# EAGLE board Analog-Digital-Mux-Breakout Panel v11 (EAGLE 6.4), part 1 of 2
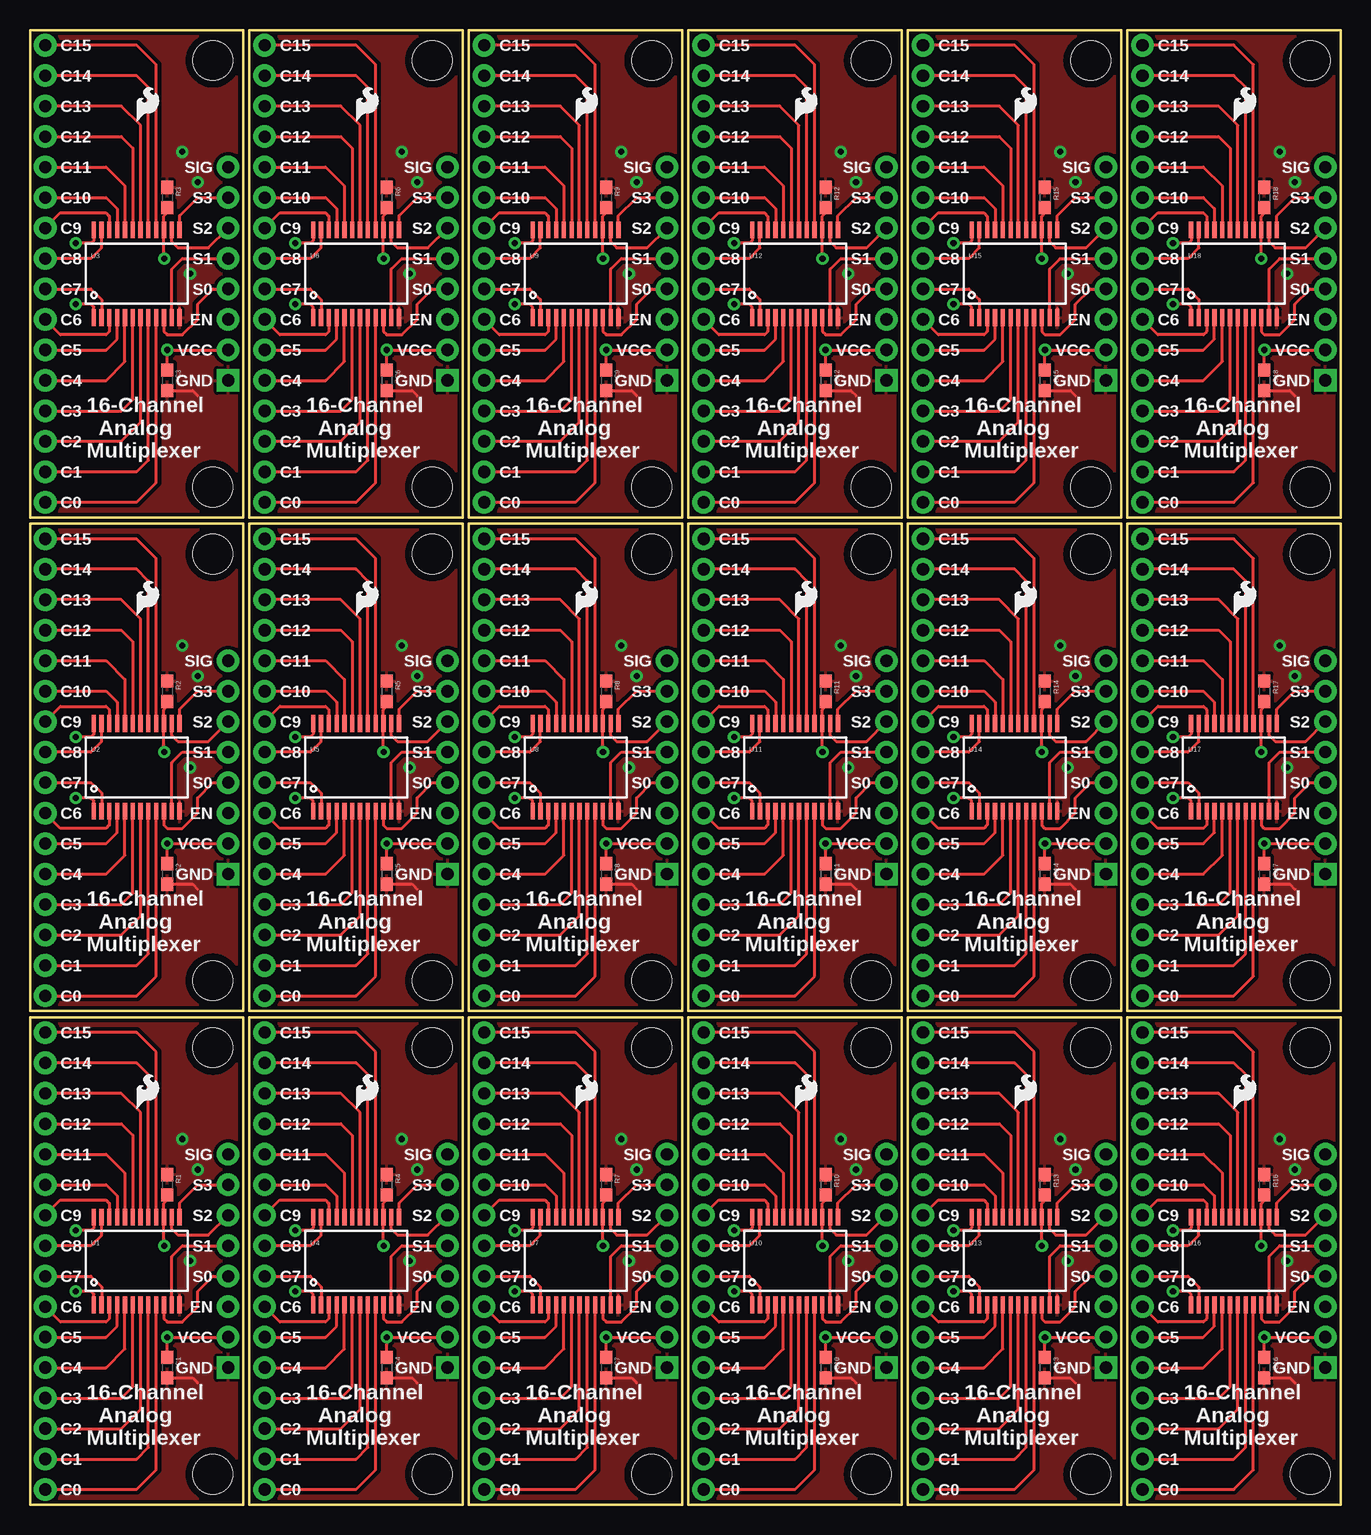
[diagram p0: board, top side]
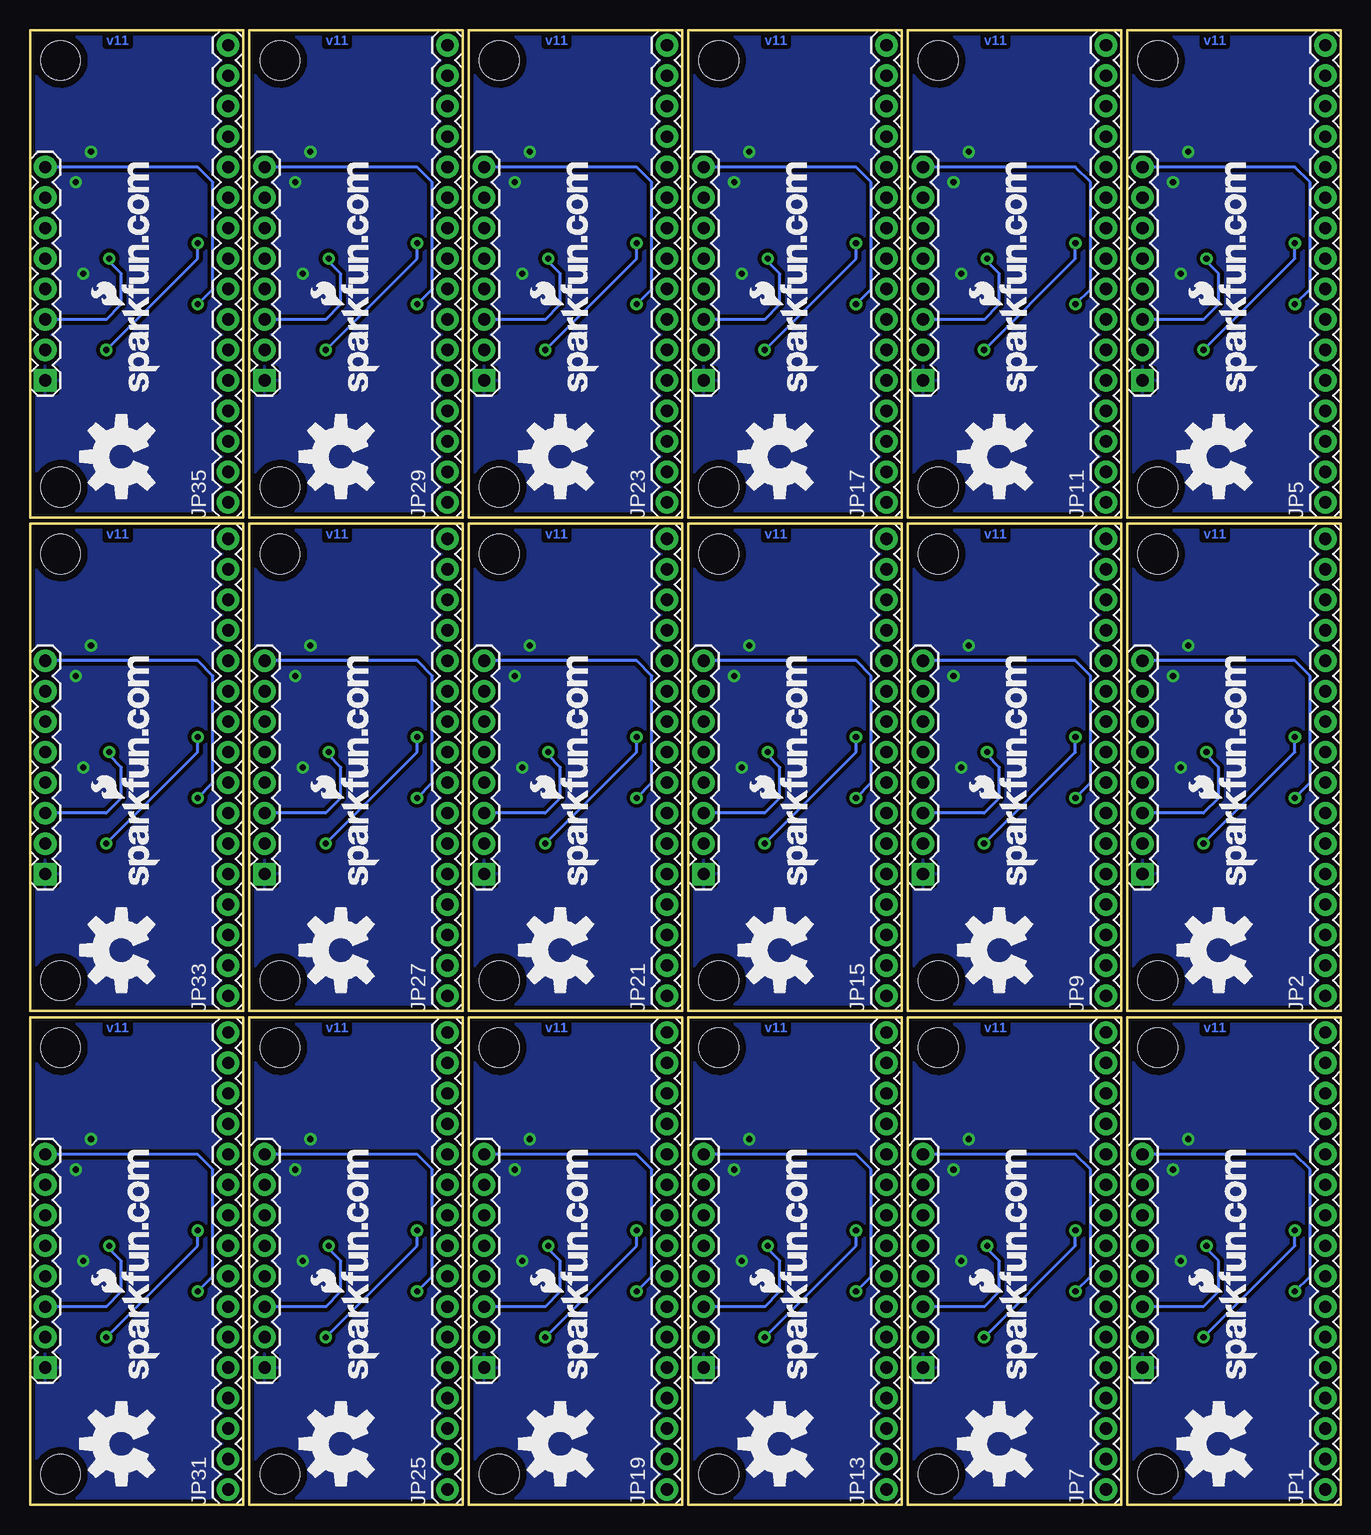
[diagram p1: board, bottom side, seen from below]

Size 109.22 x 122.94 mm. Coordinates in mm from the lower left corner, seen from the top.
Outline: 0,0 17.78,0 17.78,40.64 0,40.64 0,0
Outline: 0,41.15 17.78,41.15 17.78,81.79 0,81.79 0,41.15
Outline: 0,82.3 17.78,82.3 17.78,122.94 0,122.94 0,82.3
Outline: 18.29,0 36.07,0 36.07,40.64 18.29,40.64 18.29,0
Outline: 18.29,41.15 36.07,41.15 36.07,81.79 18.29,81.79 18.29,41.15
Outline: 18.29,82.3 36.07,82.3 36.07,122.94 18.29,122.94 18.29,82.3
Outline: 36.58,0 54.36,0 54.36,40.64 36.58,40.64 36.58,0
Outline: 36.58,41.15 54.36,41.15 54.36,81.79 36.58,81.79 36.58,41.15
Outline: 36.58,82.3 54.36,82.3 54.36,122.94 36.58,122.94 36.58,82.3
Outline: 54.86,0 72.64,0 72.64,40.64 54.86,40.64 54.86,0
Outline: 54.86,41.15 72.64,41.15 72.64,81.79 54.86,81.79 54.86,41.15
Outline: 54.86,82.3 72.64,82.3 72.64,122.94 54.86,122.94 54.86,82.3
Outline: 73.15,0 90.93,0 90.93,40.64 73.15,40.64 73.15,0
Outline: 73.15,41.15 90.93,41.15 90.93,81.79 73.15,81.79 73.15,41.15
Outline: 73.15,82.3 90.93,82.3 90.93,122.94 73.15,122.94 73.15,82.3
Outline: 91.44,0 109.22,0 109.22,40.64 91.44,40.64 91.44,0
Outline: 91.44,41.15 109.22,41.15 109.22,81.79 91.44,81.79 91.44,41.15
Outline: 91.44,82.3 109.22,82.3 109.22,122.94 91.44,122.94 91.44,82.3
Copper layers (1*16): Top 0.035mm / dielectric 1.5mm / Bottom 0.035mm
Design rules "SparkFun": minimum track width 8mil, minimum drill 20mil, track to track 8mil, track to pad 8mil, pad to pad 8mil, via to via 8mil, smd to smd 8mil, copper to edge 10mil, drill to drill 8mil, minimum pad ring 12mil, minimum via ring 10mil, stop-mask expansion 4mil, vias tented up to drill 25mil, thermal gap 10mil

## Footprints (pad centres in the part's own frame; a part is rotated, then mirrored left to right if it is on the bottom)
0603 = smd 1.1 x 1: 1 -0.85,0; 2 0.85,0
1X16 = drill 1.016 pad 1.88: 1 0,0; 2 2.54,0; 3 5.08,0; 4 7.62,0; 5 10.16,0; 6 12.7,0; 7 15.24,0; 8 17.78,0; 9 20.32,0; 10 22.86,0; 11 25.4,0; 12 27.94,0; 13 30.48,0; 14 33.02,0; 15 35.56,0; 16 38.1,0
1X08 = drill 1.016 pad 1.88 square: 1 0,0 | drill 1.016 pad 1.88: 2 2.54,0; 3 5.08,0; 4 7.62,0; 5 10.16,0; 6 12.7,0; 7 15.24,0; 8 17.78,0
STAND-OFF = hole 3.302: 0,0
SSOP24 = smd 0.348 x 1.397: 1 -3.575,-3.656; 2 -2.925,-3.656; 3 -2.275,-3.656; 4 -1.625,-3.656; 5 -0.975,-3.656; 6 -0.325,-3.656; 7 0.325,-3.656; 8 0.975,-3.656; 9 1.625,-3.656; 10 2.275,-3.656; 11 2.925,-3.656; 12 3.575,-3.656; 13 3.575,3.656; 14 2.925,3.656; 15 2.275,3.656; 16 1.625,3.656; 17 0.975,3.656; 18 0.325,3.656; 19 -0.325,3.656; 20 -0.975,3.656; 21 -1.625,3.656; 22 -2.275,3.656; 23 -2.925,3.656; 24 -3.575,3.656

## Placement (x,y rotation side)
C1  0.1uF  [0603]  11.43,11.43 270 top
C2  0.1uF  [0603]  11.43,52.58 270 top
C3  0.1uF  [0603]  11.43,93.73 270 top
C4  0.1uF  [0603]  29.72,11.43 270 top
C5  0.1uF  [0603]  29.72,52.58 270 top
C6  0.1uF  [0603]  29.72,93.73 270 top
C7  0.1uF  [0603]  48.01,11.43 270 top
C8  0.1uF  [0603]  48.01,52.58 270 top
C9  0.1uF  [0603]  48.01,93.73 270 top
C10  0.1uF  [0603]  66.29,11.43 270 top
C11  0.1uF  [0603]  66.29,52.58 270 top
C12  0.1uF  [0603]  66.29,93.73 270 top
C13  0.1uF  [0603]  84.58,11.43 270 top
C14  0.1uF  [0603]  84.58,52.58 270 top
C15  0.1uF  [0603]  84.58,93.73 270 top
C16  0.1uF  [0603]  102.87,11.43 270 top
C17  0.1uF  [0603]  102.87,52.58 270 top
C18  0.1uF  [0603]  102.87,93.73 270 top
JP1  [1X16]  1.27,1.27 90 bottom
JP2  [1X16]  1.27,42.42 90 bottom
JP3  [1X08]  16.51,11.43 90 bottom
JP4  [1X08]  16.51,52.58 90 bottom
JP5  [1X16]  1.27,83.57 90 bottom
JP6  [1X08]  16.51,93.73 90 bottom
JP7  [1X16]  19.56,1.27 90 bottom
JP8  [1X08]  34.8,11.43 90 bottom
JP9  [1X16]  19.56,42.42 90 bottom
JP10  [1X08]  34.8,52.58 90 bottom
JP11  [1X16]  19.56,83.57 90 bottom
JP12  [1X08]  34.8,93.73 90 bottom
JP13  [1X16]  37.85,1.27 90 bottom
JP14  [1X08]  53.09,11.43 90 bottom
JP15  [1X16]  37.85,42.42 90 bottom
JP16  [1X08]  53.09,52.58 90 bottom
JP17  [1X16]  37.85,83.57 90 bottom
JP18  [1X08]  53.09,93.73 90 bottom
JP19  [1X16]  56.13,1.27 90 bottom
JP20  [1X08]  71.37,11.43 90 bottom
JP21  [1X16]  56.13,42.42 90 bottom
JP22  [1X08]  71.37,52.58 90 bottom
JP23  [1X16]  56.13,83.57 90 bottom
JP24  [1X08]  71.37,93.73 90 bottom
JP25  [1X16]  74.42,1.27 90 bottom
JP26  [1X08]  89.66,11.43 90 bottom
JP27  [1X16]  74.42,42.42 90 bottom
JP28  [1X08]  89.66,52.58 90 bottom
JP29  [1X16]  74.42,83.57 90 bottom
JP30  [1X08]  89.66,93.73 90 bottom
JP31  [1X16]  92.71,1.27 90 bottom
JP32  [1X08]  107.95,11.43 90 bottom
JP33  [1X16]  92.71,42.42 90 bottom
JP34  [1X08]  107.95,52.58 90 bottom
JP35  [1X16]  92.71,83.57 90 bottom
JP36  [1X08]  107.95,93.73 90 bottom
LOGO1  OSHW-LOGOL  [OSHW-LOGO-L]  10.16,5.08 90 bottom
LOGO2  LOGO-SFESK  [SFE-LOGO-FLAME]  8.89,33.02 0 top
LOGO3  OSHW-LOGOL  [OSHW-LOGO-L]  10.16,46.23 90 bottom
LOGO4  LOGO-SFESK  [SFE-LOGO-FLAME]  8.89,74.17 0 top
LOGO5  OSHW-LOGOL  [OSHW-LOGO-L]  10.16,87.38 90 bottom
LOGO6  LOGO-SFESK  [SFE-LOGO-FLAME]  8.89,115.32 0 top
LOGO7  OSHW-LOGOL  [OSHW-LOGO-L]  28.45,5.08 90 bottom
LOGO8  LOGO-SFESK  [SFE-LOGO-FLAME]  27.18,33.02 0 top
LOGO9  OSHW-LOGOL  [OSHW-LOGO-L]  28.45,46.23 90 bottom
LOGO10  LOGO-SFESK  [SFE-LOGO-FLAME]  27.18,74.17 0 top
LOGO11  OSHW-LOGOL  [OSHW-LOGO-L]  28.45,87.38 90 bottom
LOGO12  LOGO-SFESK  [SFE-LOGO-FLAME]  27.18,115.32 0 top
LOGO13  OSHW-LOGOL  [OSHW-LOGO-L]  46.74,5.08 90 bottom
LOGO14  LOGO-SFESK  [SFE-LOGO-FLAME]  45.47,33.02 0 top
LOGO15  OSHW-LOGOL  [OSHW-LOGO-L]  46.74,46.23 90 bottom
LOGO16  LOGO-SFESK  [SFE-LOGO-FLAME]  45.47,74.17 0 top
LOGO17  OSHW-LOGOL  [OSHW-LOGO-L]  46.74,87.38 90 bottom
LOGO18  LOGO-SFESK  [SFE-LOGO-FLAME]  45.47,115.32 0 top
LOGO19  OSHW-LOGOL  [OSHW-LOGO-L]  65.02,5.08 90 bottom
LOGO20  LOGO-SFESK  [SFE-LOGO-FLAME]  63.75,33.02 0 top
LOGO21  OSHW-LOGOL  [OSHW-LOGO-L]  65.02,46.23 90 bottom
LOGO22  LOGO-SFESK  [SFE-LOGO-FLAME]  63.75,74.17 0 top
LOGO23  OSHW-LOGOL  [OSHW-LOGO-L]  65.02,87.38 90 bottom
LOGO24  LOGO-SFESK  [SFE-LOGO-FLAME]  63.75,115.32 0 top
LOGO25  OSHW-LOGOL  [OSHW-LOGO-L]  83.31,5.08 90 bottom
LOGO26  LOGO-SFESK  [SFE-LOGO-FLAME]  82.04,33.02 0 top
LOGO27  OSHW-LOGOL  [OSHW-LOGO-L]  83.31,46.23 90 bottom
LOGO28  LOGO-SFESK  [SFE-LOGO-FLAME]  82.04,74.17 0 top
LOGO29  OSHW-LOGOL  [OSHW-LOGO-L]  83.31,87.38 90 bottom
LOGO30  LOGO-SFESK  [SFE-LOGO-FLAME]  82.04,115.32 0 top
LOGO31  OSHW-LOGOL  [OSHW-LOGO-L]  101.6,5.08 90 bottom
LOGO32  LOGO-SFESK  [SFE-LOGO-FLAME]  100.33,33.02 0 top
LOGO33  OSHW-LOGOL  [OSHW-LOGO-L]  101.6,46.23 90 bottom
LOGO34  LOGO-SFESK  [SFE-LOGO-FLAME]  100.33,74.17 0 top
LOGO35  OSHW-LOGOL  [OSHW-LOGO-L]  101.6,87.38 90 bottom
LOGO36  LOGO-SFESK  [SFE-LOGO-FLAME]  100.33,115.32 0 top
R1  10K  [0603]  11.43,26.67 270 top
R2  10K  [0603]  11.43,67.82 270 top
R3  10K  [0603]  11.43,108.97 270 top
R4  10K  [0603]  29.72,26.67 270 top
R5  10K  [0603]  29.72,67.82 270 top
R6  10K  [0603]  29.72,108.97 270 top
R7  10K  [0603]  48.01,26.67 270 top
R8  10K  [0603]  48.01,67.82 270 top
R9  10K  [0603]  48.01,108.97 270 top
R10  10K  [0603]  66.29,26.67 270 top
R11  10K  [0603]  66.29,67.82 270 top
R12  10K  [0603]  66.29,108.97 270 top
R13  10K  [0603]  84.58,26.67 270 top
R14  10K  [0603]  84.58,67.82 270 top
R15  10K  [0603]  84.58,108.97 270 top
R16  10K  [0603]  102.87,26.67 270 top
R17  10K  [0603]  102.87,67.82 270 top
R18  10K  [0603]  102.87,108.97 270 top
STANDOFF1  STAND-OFF  [STAND-OFF]  15.24,38.1 0 top
STANDOFF2  STAND-OFF  [STAND-OFF]  15.24,2.54 0 top
STANDOFF3  STAND-OFF  [STAND-OFF]  15.24,79.25 0 top
STANDOFF4  STAND-OFF  [STAND-OFF]  15.24,43.69 0 top
STANDOFF5  STAND-OFF  [STAND-OFF]  15.24,120.4 0 top
STANDOFF6  STAND-OFF  [STAND-OFF]  15.24,84.84 0 top
STANDOFF7  STAND-OFF  [STAND-OFF]  33.53,38.1 0 top
STANDOFF8  STAND-OFF  [STAND-OFF]  33.53,2.54 0 top
STANDOFF9  STAND-OFF  [STAND-OFF]  33.53,79.25 0 top
STANDOFF10  STAND-OFF  [STAND-OFF]  33.53,43.69 0 top
STANDOFF11  STAND-OFF  [STAND-OFF]  33.53,120.4 0 top
STANDOFF12  STAND-OFF  [STAND-OFF]  33.53,84.84 0 top
STANDOFF13  STAND-OFF  [STAND-OFF]  51.82,38.1 0 top
STANDOFF14  STAND-OFF  [STAND-OFF]  51.82,2.54 0 top
STANDOFF15  STAND-OFF  [STAND-OFF]  51.82,79.25 0 top
STANDOFF16  STAND-OFF  [STAND-OFF]  51.82,43.69 0 top
STANDOFF17  STAND-OFF  [STAND-OFF]  51.82,120.4 0 top
STANDOFF18  STAND-OFF  [STAND-OFF]  51.82,84.84 0 top
STANDOFF19  STAND-OFF  [STAND-OFF]  70.1,38.1 0 top
STANDOFF20  STAND-OFF  [STAND-OFF]  70.1,2.54 0 top
STANDOFF21  STAND-OFF  [STAND-OFF]  70.1,79.25 0 top
STANDOFF22  STAND-OFF  [STAND-OFF]  70.1,43.69 0 top
STANDOFF23  STAND-OFF  [STAND-OFF]  70.1,120.4 0 top
STANDOFF24  STAND-OFF  [STAND-OFF]  70.1,84.84 0 top
STANDOFF25  STAND-OFF  [STAND-OFF]  88.39,38.1 0 top
STANDOFF26  STAND-OFF  [STAND-OFF]  88.39,2.54 0 top
STANDOFF27  STAND-OFF  [STAND-OFF]  88.39,79.25 0 top
STANDOFF28  STAND-OFF  [STAND-OFF]  88.39,43.69 0 top
STANDOFF29  STAND-OFF  [STAND-OFF]  88.39,120.4 0 top
STANDOFF30  STAND-OFF  [STAND-OFF]  88.39,84.84 0 top
STANDOFF31  STAND-OFF  [STAND-OFF]  106.68,38.1 0 top
STANDOFF32  STAND-OFF  [STAND-OFF]  106.68,2.54 0 top
STANDOFF33  STAND-OFF  [STAND-OFF]  106.68,79.25 0 top
STANDOFF34  STAND-OFF  [STAND-OFF]  106.68,43.69 0 top
STANDOFF35  STAND-OFF  [STAND-OFF]  106.68,120.4 0 top
STANDOFF36  STAND-OFF  [STAND-OFF]  106.68,84.84 0 top
U1  MUX-74HC4067  [SSOP24]  8.89,20.32 0 top
U2  MUX-74HC4067  [SSOP24]  8.89,61.47 0 top
U3  MUX-74HC4067  [SSOP24]  8.89,102.62 0 top
U4  MUX-74HC4067  [SSOP24]  27.18,20.32 0 top
U5  MUX-74HC4067  [SSOP24]  27.18,61.47 0 top
U6  MUX-74HC4067  [SSOP24]  27.18,102.62 0 top
U7  MUX-74HC4067  [SSOP24]  45.47,20.32 0 top
U8  MUX-74HC4067  [SSOP24]  45.47,61.47 0 top
U9  MUX-74HC4067  [SSOP24]  45.47,102.62 0 top
U10  MUX-74HC4067  [SSOP24]  63.75,20.32 0 top
U11  MUX-74HC4067  [SSOP24]  63.75,61.47 0 top
U12  MUX-74HC4067  [SSOP24]  63.75,102.62 0 top
U13  MUX-74HC4067  [SSOP24]  82.04,20.32 0 top
U14  MUX-74HC4067  [SSOP24]  82.04,61.47 0 top
U15  MUX-74HC4067  [SSOP24]  82.04,102.62 0 top
U16  MUX-74HC4067  [SSOP24]  100.33,20.32 0 top
U17  MUX-74HC4067  [SSOP24]  100.33,61.47 0 top
U18  MUX-74HC4067  [SSOP24]  100.33,102.62 0 top
U$1  LOGO-SFENEW  [SFE-NEW-WEBLOGO]  6.99,10.54 90 bottom
U$2  LOGO-SFENEW  [SFE-NEW-WEBLOGO]  6.99,51.69 90 bottom
U$3  LOGO-SFENEW  [SFE-NEW-WEBLOGO]  6.99,92.84 90 bottom
U$4  LOGO-SFENEW  [SFE-NEW-WEBLOGO]  25.27,10.54 90 bottom
U$5  LOGO-SFENEW  [SFE-NEW-WEBLOGO]  25.27,51.69 90 bottom
U$6  LOGO-SFENEW  [SFE-NEW-WEBLOGO]  25.27,92.84 90 bottom
U$7  LOGO-SFENEW  [SFE-NEW-WEBLOGO]  43.56,10.54 90 bottom
U$8  LOGO-SFENEW  [SFE-NEW-WEBLOGO]  43.56,51.69 90 bottom
U$9  LOGO-SFENEW  [SFE-NEW-WEBLOGO]  43.56,92.84 90 bottom
U$10  LOGO-SFENEW  [SFE-NEW-WEBLOGO]  61.85,10.54 90 bottom
U$11  LOGO-SFENEW  [SFE-NEW-WEBLOGO]  61.85,51.69 90 bottom
U$12  LOGO-SFENEW  [SFE-NEW-WEBLOGO]  61.85,92.84 90 bottom
U$13  LOGO-SFENEW  [SFE-NEW-WEBLOGO]  80.14,10.54 90 bottom
U$14  LOGO-SFENEW  [SFE-NEW-WEBLOGO]  80.14,51.69 90 bottom
U$15  LOGO-SFENEW  [SFE-NEW-WEBLOGO]  80.14,92.84 90 bottom
U$16  LOGO-SFENEW  [SFE-NEW-WEBLOGO]  98.42,10.54 90 bottom
U$17  LOGO-SFENEW  [SFE-NEW-WEBLOGO]  98.42,51.69 90 bottom
U$18  LOGO-SFENEW  [SFE-NEW-WEBLOGO]  98.42,92.84 90 bottom

## Library data of the parts
C1-C18 R1-R18 U1-U18 U$1-U$18 = SparkFun
JP1-JP36 = SparkFun-Connectors
LOGO1-LOGO36 = SparkFun-Aesthetics
STANDOFF1-STANDOFF36 = SparkFun-Electromechanical

## Nets
C0: JP1.1 U1.9
C1: JP1.2 U1.8
C2: JP1.3 U1.7
C3: JP1.4 U1.6
C4: JP1.5 U1.5
C5: JP1.6 U1.4
C6: JP1.7 U1.3
C7: JP1.8 U1.2
C8: JP1.9 U1.23
C9: JP1.10 U1.22
C10: JP1.11 U1.21
C11: JP1.12 U1.20
C12: JP1.13 U1.19
C13: JP1.14 U1.18
C14: JP1.15 U1.17
C15: JP1.16 U1.16
C16: JP2.1 U2.9
C17: JP2.2 U2.8
C18: JP2.3 U2.7
C19: JP2.4 U2.6
C20: JP2.5 U2.5
C21: JP2.6 U2.4
C22: JP2.7 U2.3
C23: JP2.8 U2.2
C24: JP2.9 U2.23
C25: JP2.10 U2.22
C26: JP2.11 U2.21
C27: JP2.12 U2.20
C28: JP2.13 U2.19
C29: JP2.14 U2.18
C30: JP2.15 U2.17
C31: JP2.16 U2.16
C32: JP5.1 U3.9
C33: JP5.2 U3.8
C34: JP5.3 U3.7
C35: JP5.4 U3.6
C36: JP5.5 U3.5
C37: JP5.6 U3.4
C38: JP5.7 U3.3
C39: JP5.8 U3.2
C40: JP5.9 U3.23
C41: JP5.10 U3.22
C42: JP5.11 U3.21
C43: JP5.12 U3.20
C44: JP5.13 U3.19
C45: JP5.14 U3.18
C46: JP5.15 U3.17
C47: JP5.16 U3.16
C48: JP7.1 U4.9
C49: JP7.2 U4.8
C50: JP7.3 U4.7
C51: JP7.4 U4.6
C52: JP7.5 U4.5
C53: JP7.6 U4.4
C54: JP7.7 U4.3
C55: JP7.8 U4.2
C56: JP7.9 U4.23
C57: JP7.10 U4.22
C58: JP7.11 U4.21
C59: JP7.12 U4.20
C60: JP7.13 U4.19
C61: JP7.14 U4.18
C62: JP7.15 U4.17
C63: JP7.16 U4.16
C64: JP9.1 U5.9
C65: JP9.2 U5.8
C66: JP9.3 U5.7
C67: JP9.4 U5.6
C68: JP9.5 U5.5
C69: JP9.6 U5.4
C70: JP9.7 U5.3
C71: JP9.8 U5.2
C72: JP9.9 U5.23
C73: JP9.10 U5.22
C74: JP9.11 U5.21
C75: JP9.12 U5.20
C76: JP9.13 U5.19
C77: JP9.14 U5.18
C78: JP9.15 U5.17
C79: JP9.16 U5.16
C80: JP11.1 U6.9
C81: JP11.2 U6.8
C82: JP11.3 U6.7
C83: JP11.4 U6.6
C84: JP11.5 U6.5
C85: JP11.6 U6.4
C86: JP11.7 U6.3
C87: JP11.8 U6.2
C88: JP11.9 U6.23
C89: JP11.10 U6.22
C90: JP11.11 U6.21
C91: JP11.12 U6.20
C92: JP11.13 U6.19
C93: JP11.14 U6.18
C94: JP11.15 U6.17
C95: JP11.16 U6.16
C96: JP13.1 U7.9
C97: JP13.2 U7.8
C98: JP13.3 U7.7
C99: JP13.4 U7.6
C100: JP13.5 U7.5
C101: JP13.6 U7.4
C102: JP13.7 U7.3
C103: JP13.8 U7.2
C104: JP13.9 U7.23
C105: JP13.10 U7.22
C106: JP13.11 U7.21
C107: JP13.12 U7.20
C108: JP13.13 U7.19
C109: JP13.14 U7.18
C110: JP13.15 U7.17
C111: JP13.16 U7.16
C112: JP15.1 U8.9
C113: JP15.2 U8.8
C114: JP15.3 U8.7
C115: JP15.4 U8.6
C116: JP15.5 U8.5
C117: JP15.6 U8.4
C118: JP15.7 U8.3
C119: JP15.8 U8.2
C120: JP15.9 U8.23
C121: JP15.10 U8.22
C122: JP15.11 U8.21
C123: JP15.12 U8.20
C124: JP15.13 U8.19
C125: JP15.14 U8.18
C126: JP15.15 U8.17
C127: JP15.16 U8.16
C128: JP17.1 U9.9
C129: JP17.2 U9.8
C130: JP17.3 U9.7
C131: JP17.4 U9.6
C132: JP17.5 U9.5
C133: JP17.6 U9.4
C134: JP17.7 U9.3
C135: JP17.8 U9.2
C136: JP17.9 U9.23
C137: JP17.10 U9.22
C138: JP17.11 U9.21
C139: JP17.12 U9.20
C140: JP17.13 U9.19
C141: JP17.14 U9.18
C142: JP17.15 U9.17
C143: JP17.16 U9.16
C144: JP19.1 U10.9
C145: JP19.2 U10.8
C146: JP19.3 U10.7
C147: JP19.4 U10.6
C148: JP19.5 U10.5
C149: JP19.6 U10.4
C150: JP19.7 U10.3
C151: JP19.8 U10.2
C152: JP19.9 U10.23
C153: JP19.10 U10.22
C154: JP19.11 U10.21
C155: JP19.12 U10.20
C156: JP19.13 U10.19
C157: JP19.14 U10.18
C158: JP19.15 U10.17
C159: JP19.16 U10.16
C160: JP21.1 U11.9
C161: JP21.2 U11.8
C162: JP21.3 U11.7
C163: JP21.4 U11.6
C164: JP21.5 U11.5
C165: JP21.6 U11.4
C166: JP21.7 U11.3
C167: JP21.8 U11.2
C168: JP21.9 U11.23
C169: JP21.10 U11.22
C170: JP21.11 U11.21
C171: JP21.12 U11.20
C172: JP21.13 U11.19
C173: JP21.14 U11.18
C174: JP21.15 U11.17
C175: JP21.16 U11.16
C176: JP23.1 U12.9
C177: JP23.2 U12.8
C178: JP23.3 U12.7
C179: JP23.4 U12.6
C180: JP23.5 U12.5
C181: JP23.6 U12.4
C182: JP23.7 U12.3
C183: JP23.8 U12.2
C184: JP23.9 U12.23
C185: JP23.10 U12.22
C186: JP23.11 U12.21
C187: JP23.12 U12.20
C188: JP23.13 U12.19
C189: JP23.14 U12.18
C190: JP23.15 U12.17
C191: JP23.16 U12.16
C192: JP25.1 U13.9
C193: JP25.2 U13.8
C194: JP25.3 U13.7
C195: JP25.4 U13.6
C196: JP25.5 U13.5
C197: JP25.6 U13.4
C198: JP25.7 U13.3
C199: JP25.8 U13.2
C200: JP25.9 U13.23
C201: JP25.10 U13.22
C202: JP25.11 U13.21
C203: JP25.12 U13.20
C204: JP25.13 U13.19
C205: JP25.14 U13.18
C206: JP25.15 U13.17
C207: JP25.16 U13.16
C208: JP27.1 U14.9
C209: JP27.2 U14.8
C210: JP27.3 U14.7
C211: JP27.4 U14.6
C212: JP27.5 U14.5
C213: JP27.6 U14.4
C214: JP27.7 U14.3
C215: JP27.8 U14.2
C216: JP27.9 U14.23
C217: JP27.10 U14.22
C218: JP27.11 U14.21
C219: JP27.12 U14.20
C220: JP27.13 U14.19
C221: JP27.14 U14.18
C222: JP27.15 U14.17
C223: JP27.16 U14.16
C224: JP29.1 U15.9
C225: JP29.2 U15.8
C226: JP29.3 U15.7
C227: JP29.4 U15.6
C228: JP29.5 U15.5
C229: JP29.6 U15.4
C230: JP29.7 U15.3
C231: JP29.8 U15.2
C232: JP29.9 U15.23
C233: JP29.10 U15.22
C234: JP29.11 U15.21
C235: JP29.12 U15.20
C236: JP29.13 U15.19
C237: JP29.14 U15.18
C238: JP29.15 U15.17
C239: JP29.16 U15.16
C240: JP31.1 U16.9
C241: JP31.2 U16.8
C242: JP31.3 U16.7
C243: JP31.4 U16.6
C244: JP31.5 U16.5
C245: JP31.6 U16.4
C246: JP31.7 U16.3
C247: JP31.8 U16.2
C248: JP31.9 U16.23
C249: JP31.10 U16.22
C250: JP31.11 U16.21
C251: JP31.12 U16.20
C252: JP31.13 U16.19
C253: JP31.14 U16.18
C254: JP31.15 U16.17
C255: JP31.16 U16.16
C256: JP33.1 U17.9
C257: JP33.2 U17.8
C258: JP33.3 U17.7
C259: JP33.4 U17.6
C260: JP33.5 U17.5
C261: JP33.6 U17.4
C262: JP33.7 U17.3
C263: JP33.8 U17.2
C264: JP33.9 U17.23
C265: JP33.10 U17.22
C266: JP33.11 U17.21
C267: JP33.12 U17.20
C268: JP33.13 U17.19
C269: JP33.14 U17.18
C270: JP33.15 U17.17
C271: JP33.16 U17.16
C272: JP35.1 U18.9
C273: JP35.2 U18.8
C274: JP35.3 U18.7
C275: JP35.4 U18.6
C276: JP35.5 U18.5
C277: JP35.6 U18.4
C278: JP35.7 U18.3
C279: JP35.8 U18.2
C280: JP35.9 U18.23
C281: JP35.10 U18.22
C282: JP35.11 U18.21
C283: JP35.12 U18.20
C284: JP35.13 U18.19
C285: JP35.14 U18.18
C286: JP35.15 U18.17
C287: JP35.16 U18.16
EN: JP3.3 R1.2 U1.15
EN1: JP4.3 R2.2 U2.15
EN2: JP6.3 R3.2 U3.15
EN3: JP8.3 R4.2 U4.15
EN4: JP10.3 R5.2 U5.15
EN5: JP12.3 R6.2 U6.15
EN6: JP14.3 R7.2 U7.15
EN7: JP16.3 R8.2 U8.15
EN8: JP18.3 R9.2 U9.15
EN9: JP20.3 R10.2 U10.15
EN10: JP22.3 R11.2 U11.15
EN11: JP24.3 R12.2 U12.15
EN12: JP26.3 R13.2 U13.15
EN13: JP28.3 R14.2 U14.15
EN14: JP30.3 R15.2 U15.15
EN15: JP32.3 R16.2 U16.15
EN16: JP34.3 R17.2 U17.15
EN17: JP36.3 R18.2 U18.15
GND: C1.2 JP3.1 R1.1 U1.12
GND1: C2.2 JP4.1 R2.1 U2.12
GND2: C3.2 JP6.1 R3.1 U3.12
GND3: C4.2 JP8.1 R4.1 U4.12
GND4: C5.2 JP10.1 R5.1 U5.12
GND5: C6.2 JP12.1 R6.1 U6.12
GND6: C7.2 JP14.1 R7.1 U7.12
GND7: C8.2 JP16.1 R8.1 U8.12
GND8: C9.2 JP18.1 R9.1 U9.12
GND9: C10.2 JP20.1 R10.1 U10.12
GND10: C11.2 JP22.1 R11.1 U11.12
GND11: C12.2 JP24.1 R12.1 U12.12
GND12: C13.2 JP26.1 R13.1 U13.12
GND13: C14.2 JP28.1 R14.1 U14.12
GND14: C15.2 JP30.1 R15.1 U15.12
GND15: C16.2 JP32.1 R16.1 U16.12
GND16: C17.2 JP34.1 R17.1 U17.12
GND17: C18.2 JP36.1 R18.1 U18.12
S0: JP3.4 U1.10
S1: JP3.5 U1.11
S2: JP3.6 U1.14
S3: JP3.7 U1.13
S4: JP4.4 U2.10
S5: JP4.5 U2.11
S6: JP4.6 U2.14
S7: JP4.7 U2.13
S8: JP6.4 U3.10
S9: JP6.5 U3.11
S10: JP6.6 U3.14
S11: JP6.7 U3.13
S12: JP8.4 U4.10
S13: JP8.5 U4.11
S14: JP8.6 U4.14
S15: JP8.7 U4.13
S16: JP10.4 U5.10
S17: JP10.5 U5.11
S18: JP10.6 U5.14
S19: JP10.7 U5.13
S20: JP12.4 U6.10
S21: JP12.5 U6.11
S22: JP12.6 U6.14
S23: JP12.7 U6.13
S24: JP14.4 U7.10
S25: JP14.5 U7.11
S26: JP14.6 U7.14
S27: JP14.7 U7.13
S28: JP16.4 U8.10
S29: JP16.5 U8.11
S30: JP16.6 U8.14
S31: JP16.7 U8.13
S32: JP18.4 U9.10
S33: JP18.5 U9.11
S34: JP18.6 U9.14
S35: JP18.7 U9.13
S36: JP20.4 U10.10
S37: JP20.5 U10.11
S38: JP20.6 U10.14
S39: JP20.7 U10.13
S40: JP22.4 U11.10
S41: JP22.5 U11.11
S42: JP22.6 U11.14
S43: JP22.7 U11.13
S44: JP24.4 U12.10
S45: JP24.5 U12.11
S46: JP24.6 U12.14
S47: JP24.7 U12.13
S48: JP26.4 U13.10
S49: JP26.5 U13.11
S50: JP26.6 U13.14
S51: JP26.7 U13.13
S52: JP28.4 U14.10
S53: JP28.5 U14.11
S54: JP28.6 U14.14
S55: JP28.7 U14.13
S56: JP30.4 U15.10
S57: JP30.5 U15.11
S58: JP30.6 U15.14
S59: JP30.7 U15.13
S60: JP32.4 U16.10
S61: JP32.5 U16.11
S62: JP32.6 U16.14
S63: JP32.7 U16.13
S64: JP34.4 U17.10
S65: JP34.5 U17.11
S66: JP34.6 U17.14
S67: JP34.7 U17.13
S68: JP36.4 U18.10
S69: JP36.5 U18.11
S70: JP36.6 U18.14
S71: JP36.7 U18.13
SIG: JP3.8 U1.1
SIG1: JP4.8 U2.1
SIG2: JP6.8 U3.1
SIG3: JP8.8 U4.1
SIG4: JP10.8 U5.1
SIG5: JP12.8 U6.1
SIG6: JP14.8 U7.1
SIG7: JP16.8 U8.1
SIG8: JP18.8 U9.1
SIG9: JP20.8 U10.1
SIG10: JP22.8 U11.1
SIG11: JP24.8 U12.1
SIG12: JP26.8 U13.1
SIG13: JP28.8 U14.1
SIG14: JP30.8 U15.1
SIG15: JP32.8 U16.1
SIG16: JP34.8 U17.1
SIG17: JP36.8 U18.1
VCC: C1.1 JP3.2 U1.24
VCC1: C2.1 JP4.2 U2.24
VCC2: C3.1 JP6.2 U3.24
VCC3: C4.1 JP8.2 U4.24
VCC4: C5.1 JP10.2 U5.24
VCC5: C6.1 JP12.2 U6.24
VCC6: C7.1 JP14.2 U7.24
VCC7: C8.1 JP16.2 U8.24
VCC8: C9.1 JP18.2 U9.24
VCC9: C10.1 JP20.2 U10.24
VCC10: C11.1 JP22.2 U11.24
VCC11: C12.1 JP24.2 U12.24
VCC12: C13.1 JP26.2 U13.24
VCC13: C14.1 JP28.2 U14.24
VCC14: C15.1 JP30.2 U15.24
VCC15: C16.1 JP32.2 U16.24
VCC16: C17.1 JP34.2 U17.24
VCC17: C18.1 JP36.2 U18.24